# Altium PCB Mixed Signal Board Design Project.PcbDoc (part 2 of 2)
Units mm, origin at the board's own origin, x right, y up, seen from the top; angles counter-clockwise.
Board outline 70 x 70 mm, 4 copper layers (Top Layer, GND, VCC, Bottom Layer), stack 1.57 mm thick; 188 components, 142 nets, 738 pads, 121 vias.
Unrouted connection lines stored in the file: 495.
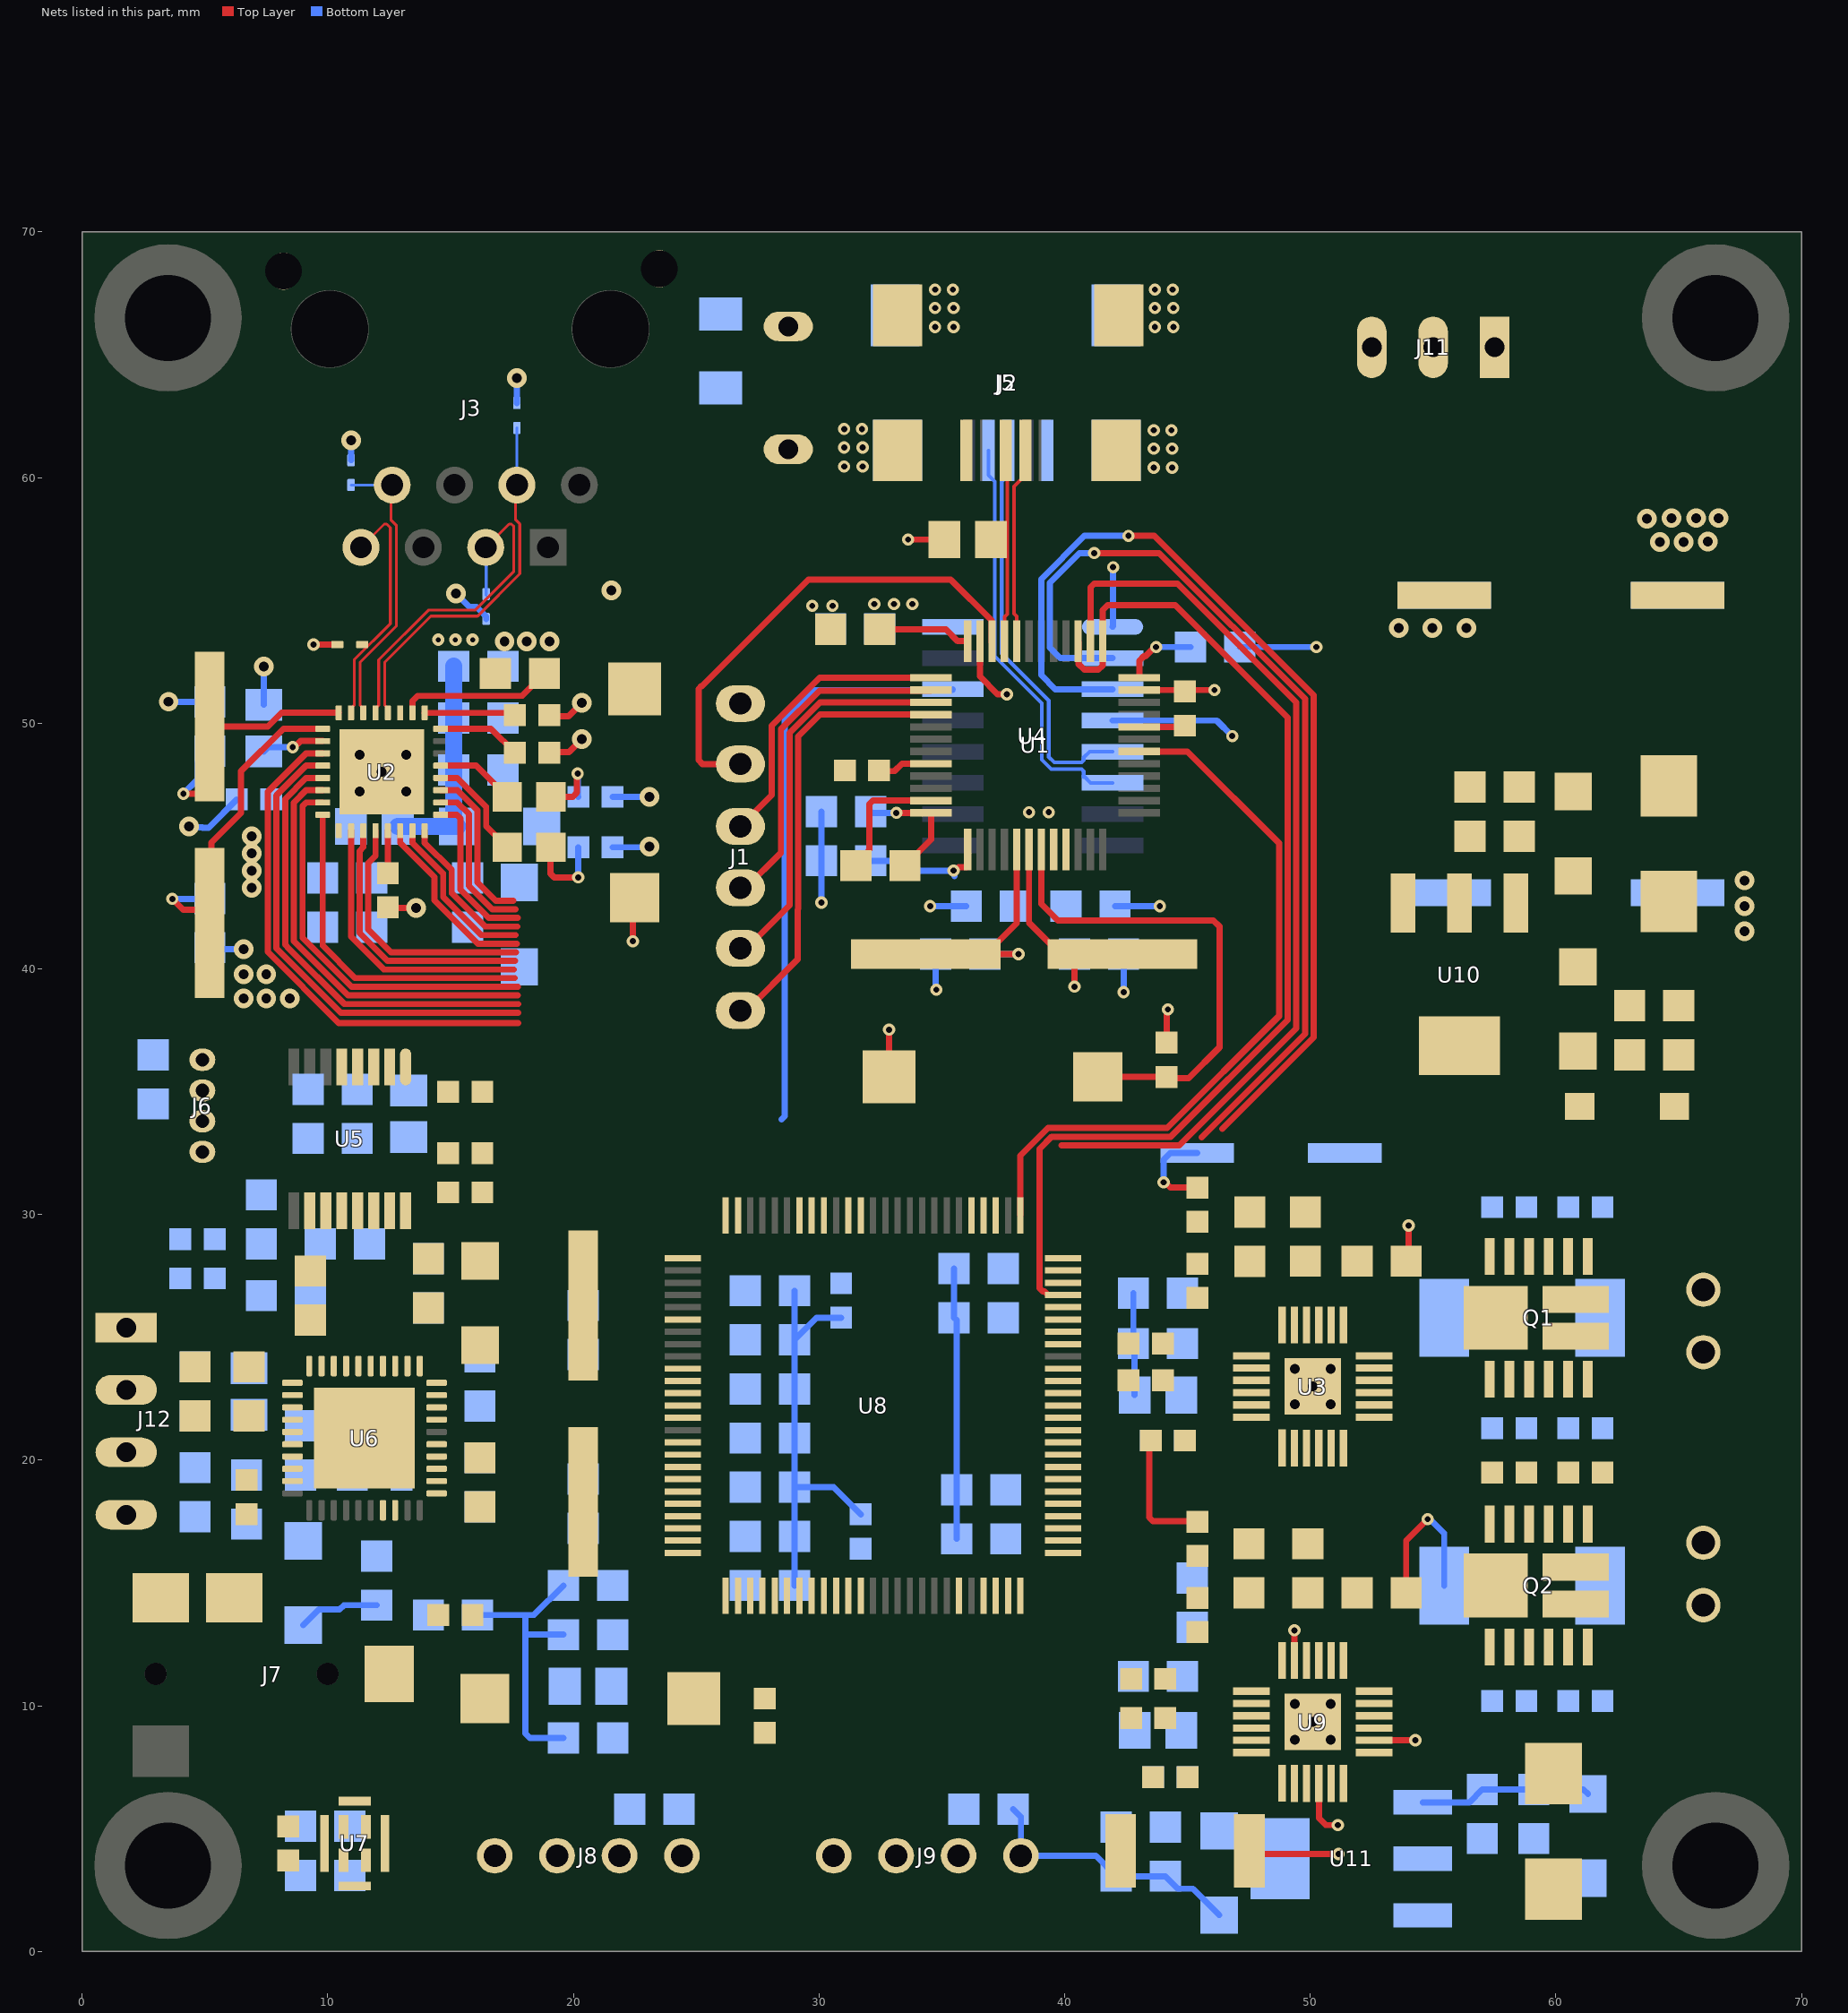
[diagram p4: the nets of this part, all layers, seen from the top]

## Part data (continued)
R2: library part RES_1.5K-0.125W-1%-0805, "1.5 kOhms ±1% 0.125W, 1/8W Chip Resistor 0805 (2012 Metric) Thick Film", Alternate Part Number-1=NA, Case/Package=0805, Manufacturer="TE Connectivity Passive Product", Manufacturer Part Number=CRG0805F1K5, Supplier Part Number-1=NA, Supplier-1=SIRICOM
R4 R8 R9 R10 R15 R16 R17 R18 R21 R22 R23 R24 R25 R26 R30 R33 R35 R39 R40 R41 R42 R45 R46 R47 R48: library part RES_10K-0.1W-1%-0603, "10 kOhms ±1% 0.1W, 1/10W Chip Resistor 0603 (1608 Metric) Automotive AEC-Q200 Thick Film", Alternate Part Number-1=0603WAJ0103T5E, Case/Package=0603, Manufacturer=Walsin, Manufacturer Part Number=WR06X1002FTL, Supplier Part Number-1=WR06X1002FTL, Supplier-1=SIRICOM
R5 R6 R7 R14 R38: library part RES_3.3K-0.1W-1%-0603, "3.3 kOhms ±1% 0.1W, 1/10W Chip Resistor 0603 (1608 Metric) Automotive AEC-Q200 Thick Film", Alternate Part Number-1=0603WAF3301T5E, Case/Package=0603, Manufacturer=Wilson, Manufacturer Part Number=WR06X3301FTL, Supplier Part Number-1=WR06X3301FTL, Supplier-1=SIRICOM
R11: library part RES_6.49K-0.125W-1%-0805, "6.49 kOhms ±1% 0.125W, 1/8W Chip Resistor 0805 (2012 Metric) Moisture Resistant Thick Film", Alternate Part Number-1=NA, Case/Package=0805, Manufacturer="Stackpole Electronics", Manufacturer Part Number=RC0805FR-076K49L, Supplier Part Number-1=WRO8X6491FTL, Supplier-1=SIRICOM
R12: library part RES_1M-0.25W-1%-1206, "1 MOhms ±1% 0.25W, 1/4W Chip Resistor 1206 (3216 Metric) Automotive AEC-Q200, High Voltage Thick Film", Alternate Part Number-1=NA, Case/Package=1206, Manufacturer=Walsin, Manufacturer Part Number=WR12X1004FTL, Supplier Part Number-1=WR12X1004FTL, Supplier-1=SIRICOM
R13 R37: library part RES_2K2-0.1W-5%-0603, "2.2 kOhms ±5% 0.1W, 1/10W Chip Resistor 0603 (1608 Metric) Automotive AEC-Q200 Thick Film", Alternate Part Number-1=WR06X2201FTL, Case/Package=0603, Manufacturer="Stackpole Electronics", Manufacturer Part Number=ERJ-3GEYJ222V, Supplier Part Number-1=WR06X2201FTL, Supplier-1=SIRICOM
R19 R43: library part RES_33K-0.125W-1%-0805, "Thick Film Resistors - SMD 33KOhms 1/8W 150V33 kOhms ±1% 0.125W, 1/8W Chip Resistor 0805 (2012 Metric) Thick Film", Alternate Part Number-1=NA, Case/Package=0805, Manufacturer="Vishay BCcomponents", Manufacturer Part Number=CRG0805F33K, Supplier Part Number-1=WR08X3302FTL, Supplier-1=SIRICOM
R20 R44: library part RES_50mOhm-2W-1%-2512, "50 mOhms ±1% 2W Chip Resistor 2512 (6432 Metric) Automotive AEC-Q200, Current Sense, Moisture Resistant Metal Element", Alternate Part Number-1=PMR100HZPFU5L00, Case/Package=2512, Manufacturer=Yageo, Manufacturer Part Number=PA2512FKF7W0R05E, Supplier Part Number-1=LR2512-22R060F1, Supplier-1=SIRICOM
R28 R29: library part RES_1K-0.1W-1%-0603, "1 kOhms ±1% 0.1W, 1/10W Chip Resistor 0603 (1608 Metric) Automotive AEC-Q200 Thick Film", Alternate Part Number-1=0603WAF1001T5E, Case/Package=0603, Manufacturer=Walsin, Manufacturer Part Number=WR06X1001FTL, Supplier Part Number-1=WR06X1001FTL, Supplier-1=SIRICOM
R31 R32: library part RES_51.1R-0.1W-1%-0603, "51.1 Ohms ±1% 0.1W, 1/10W Chip Resistor 0603 (1608 Metric) Thick Film", Alternate Part Number-1=NA, Case/Package=0603, Manufacturer="Vishay Dale", Manufacturer Part Number=CRCW060351R1FKEAC, Supplier Part Number-1="541-5468-1-ND - Cut Tape (CT)", Supplier-1=Digikey
SW1 SW2 SW3: library part SW1_RS-282G05A3-SMRT-SMD, "Tactile Switch SPST-NO Top Actuated Surface Mount", Alternate Part Number-1=NA, Case/Package=SMD, Manufacturer="ITT C&K", Manufacturer Part Number=RS-282G05A3-SMRT, Supplier Part Number-1=RS-282G05A3-SMRT, Supplier-1="SP ROAD"
U1: library part IC_STM32F103C8T6, "ARM® Cortex®-M3 STM32F1 Microcontroller IC 32-Bit 72MHz 64KB (64K x 8) FLASH 48-LQFP (7x7)", Alternate Part Number-1=NA, Case/Package=LQFP48, Manufacturer=STMicroelectronics, Manufacturer Part Number=STM32F103C8T6, Supplier Part Number-1=STM32F103C8T6, Supplier-1=LCSC
U2: library part IC_DP83826IRHBR, "Ethernet ICs Low latency 10/100-Mbps PHY, MII interface and enhanced mode with an industrial temperature range 32-VQFN -40 to 85", Alternate Part Number-1=NA, Case/Package=32-VQFN, Manufacturer="Texas Instruments", Supplier Part Number-1=595-DP83826IRHBR, Manufacturer Part Number=DP83826IRHBR, Supplier-1=Mouser
U3 U9: library part IC_DRV8701ERGET, "Motor Driver Power MOSFET Parallel 24-VQFN (4x4)", Alternate Part Number-1=NA, Case/Package=VFQFN24, Manufacturer="Texas Instruments", Manufacturer Part Number=DRV8701ERGET, Supplier Part Number-1=DRV8701ERGET, Supplier-1=ARROW
U4: library part IC_CH340C, "USB Bridge, USB to UART USB 2.0 UART Interface", Alternate Part Number-1=NA, Case/Package=SOIC16, Manufacturer=Olimex, Supplier Part Number-1=C84681, Manufacturer Part Number=CH340C, Supplier-1=LCSC
U5: library part IC_ADS122C04IPW, "24 Bit Analog to Digital Converter 4 Input 1 Sigma-Delta 16-TSSOP", Alternate Part Number-1=NA, Case/Package=TSSOP16, Manufacturer="Texas Instruments", Manufacturer Part Number=ADS122C04IPW, Supplier Part Number-1=ADS122C04IPW, Supplier-1=MOUSER
U6: library part IC_CS43L22, "Audio D/A Converter ICs Low Power Stereo DAC w/ClassD Spkr Driver", Alternate Part Number-1=NA, Case/Package=QFN-40, Manufacturer="Cirrus Logic", Supplier Part Number-1=777-CS43L22-CNZ, Manufacturer Part Number=CS43L22-CNZ, Supplier-1=Mouser
U7: library part IC_IMP34DT05TR, "MEMS Microphones AUTO & INDUSTRIAL SENSORS", Alternate Part Number-1=NA, Case/Package=HCLGA-4, Manufacturer=STMicroelectronics, Supplier Part Number-1=511-IMP34DT05TR, Manufacturer Part Number=IMP34DT05TR, Supplier-1=Mouser
U8: library part IC_STM32F407VGT6, "ARM® Cortex®-M4 STM32F4 Microcontroller IC 32-Bit 168MHz 1MB (1M x 8) FLASH 100-LQFP (14x14)", Alternate Part Number-1=STM32F407VET6, Case/Package=LQFP100, Manufacturer=STMicroelectronics, Manufacturer Part Number=STM32F407VGT6, Supplier Part Number-1=STM32F407VGT6, Supplier-1=ARROW
U10 U11: library part REG_15V-3.3V-0.9A-12W-SOT223, "Linear Voltage Regulator IC 1 Output 800mA SOT-223", Alternate Part Number-1=NA, Case/Package=SOT223, Manufacturer=STMicroelectronics, Manufacturer Part Number=LD1117S33CTR, Supplier Part Number-1=LD1117S33CTR, Supplier-1="SP ROAD"
X1 X2: library part XTAL_8MHZ-ECS-80-32-5PX-SMD, "8MHz ±30ppm Crystal 32pF 60 Ohms HC-49/US", Alternate Part Number-1=NA, Case/Package=SMD/SMT, Manufacturer="Fox Electronics", Manufacturer Part Number=ECS-80-32-5PX-TR, Supplier Part Number-1=ECS-80-32-5PX-TR, Supplier-1="SP ROAD"
Y1: library part XTAL_25Mhz-FOXSDLF/250F-20, "25MHz ±30ppm Crystal 20pF 30 Ohms HC-49/US", Alternate Part Number-1=NA, Case/Package=SMD, Manufacturer=Abracon, Manufacturer Part Number=FOXSDLF/250F-20, Supplier Part Number-1=FOXSDLF/250F-20, Supplier-1=MOUSER

## Via types
v1: diameter 0.5, hole 0.25, Top Layer to Bottom Layer, tented both sides, 64 vias
v2: diameter 0.8, hole 0.4, Top Layer to Bottom Layer, tented both sides, 52 vias
v3: diameter 0.5, hole 0.2, Top Layer to Bottom Layer, tented both sides, 2 vias
v4: diameter 0.5/0.5 (per signal layer), hole 0.25, Top Layer to Bottom Layer, tented both sides, 1 vias
v5: diameter 0.8, hole 0.4, Top Layer to Bottom Layer, 1 vias
v6: diameter 0.5/0.5 (per signal layer), hole 0.2, Top Layer to Bottom Layer, tented both sides, 1 vias

## Nets (pads, with @x,y where several pads share a name; then routed paths per layer and width w, separated by ;. In a path a pad name is that pad's centre, name@x,y a point inside that pad or via, vN(x,y) a via of type N, cw(c..) or ccw(c..) an arc to the next point about the centre after c; other vN are vias at no path point)
+1V8: C41.2 C42.2 C90.2 C91.2 C92.2 D8.K FB4.1 U6.34 U11.2 U11.4
+3V3: C1.2 C2.2 C3.2 C4.2 C7.2 C8.2 C9.2 C16.1 C17.1 C18.1 C19.1 C29.2 C31.2 C35.2 C45.2 C46.2 C47.1 C48.2 C53.2 C54.2 C55.2 C56.2 C59.2 C60.2 C61.2 C62.2 C63.2 C64.2 C74.2 C84.2 C85.2 C86.2 D6.K FB1.1 FB3.1 FB5.1 J6.3 J8.3 J9.3 R2.2 R4.2 R7.1 R8.2 R9.2 R10.2 R23.2 R25.2 R26.2 R27.1 R30.2 R33.2 R35.2 R47.2 U1.1 U1.9 U1.24 U1.36 U1.48 U2.17 U4.4 U4.16 U5.13 U6.5 U6.8 U6.33 U7.1 U8.6 U8.11 U8.19 U8.28 U8.50 U8.75 U8.100 U10.2 U10.4 | length 31.7
  Top Layer w0.254: R8.2@12.45,42.501 12.476,42.475 v2(13.6,42.475) ; R7.1@19.019,48.8 19.044,48.825 19.825,48.825 v2(20.35,49.35) ; R9.2@19.019,50.322 19.066,50.275 19.8,50.275 v2(20.35,50.825) ; C3.2@32.475,53.825 35.163,53.825 35.65,53.338 U1.36@36.05,53.338 ; v1(33.15,46.35) U1.48@34.562,46.35 34.562,45.262 C4.2@33.5,44.2 ; v1(33.625,57.475) R2.2@35.1,57.475 ; v1(35.475,44) 35.542,44 35.681,44.139 36.027,44.139 36.05,44.162 U1.1@36.05,44.862 ; U1.24@43.038,51.85 43.038,52.538 43.218,52.718 43.276,52.718 43.658,53.1 v4(43.725,53.1) ; R4.2@44.15,36.999 44.15,38.3 v1(44.2,38.35)
  Bottom Layer w0.254: v2(4.35,45.8) 4.397,45.753 4.895,45.753 4.897,45.75 5.151,45.75 R10.2@6.301,46.9 ; C1.2@32.1,44.4 33.275,44.4 33.675,44 v1(35.475,44) 35.522,43.953 v1@35.522,43.778 ; C2.2@32.1,46.4 32.15,46.35 v1(33.15,46.35) ; U4.4@41.95,50.11 46.19,50.11 v1(46.825,49.475) ; v4(43.725,53.1) C9.2@45.125,53.1
  other v1: 38.55,46.375 39.35,46.375 32.25,54.85 33.05,54.85 33.8,54.85
  other v2: 6.9,43.3 6.9,44 6.9,44.7 6.9,45.4
+12V: C24.1 C25.1 C26.2 C76.1 C78.2 C81.1 C82.1 C83.1 D5.A D7.A J11.1 Q1.2 Q1.11 Q1.15 Q2.2 Q2.11 Q2.15 U3.1 U9.1
  other v2: 67.675,41.525 67.675,42.55 67.675,43.6 64.225,57.375 65.2,57.375 66.175,57.4 63.7,58.325 64.7,58.35 65.7,58.35 66.625,58.35
AIN0: J6.1 R28.2
AIN1: J6.2 R29.2
CAN_RX: J8.1 U8.70
CAN_TX: J8.2 U8.71
CH340_RST: U4.14 U8.57 | length 23.7
  Bottom Layer w0.254: 28.475,33.875 28.6,34 28.6,50.2 29.75,51.35 35.42,51.35 U4.14@35.45,51.38
CH340_RX_PORT: U4.3 U8.78 | length 40.8
  Top Layer w0.254: v1(42.6,57.625) 43.651,57.625 50.141,51.135 50.141,37.215 46.413,33.487
  Bottom Layer w0.254: U4.3@41.95,51.38 39.62,51.38 39.046,51.954 39.046,55.868 40.803,57.625 v1(42.6,57.625)
CH340_TX_PORT: U4.2 U8.79 | length 38.3
  Top Layer w0.254: v1(41.2,56.925) 43.851,56.925 49.787,50.989 49.787,37.362 45.575,33.15
  Bottom Layer w0.254: v1(41.2,56.925) 40.604,56.925 39.4,55.721 39.4,53.075 39.825,52.65 U4.2@41.95,52.65
CH340USB_N: J5.2 U4.6 | length 16.9
  Bottom Layer w0.15: J5.2@36.9,61.1 36.9,60.1 37.162,59.838 37.162,52.722 39.075,50.808 39.075,48.51 39.459,48.126 40.687,48.126 40.775,48.038 40.775,47.813 40.817,47.813 41.059,47.57 U4.6@41.95,47.57
CH340USB_P: J5.3 U4.5 | length 16.3
  Bottom Layer w0.15: J5.3@37.7,61.1 37.7,60.1 37.439,59.838 37.439,52.837 39.352,50.923 39.352,48.625 39.574,48.403 40.687,48.403 40.775,48.491 40.775,48.598 41.018,48.84 U4.5@41.95,48.84
CLK_MIC: U7.3 U8.65
COL: DS1.A U2.28 U8.26 | length 4.3
  Top Layer w0.25: U2.28@14.6,47.772 15.278,47.772 16.45,46.6 16.45,45.811 DS1.A@17.311,44.95
CRS: DS2.A U2.29 U8.23 | length 3.2
  Top Layer w0.25: U2.29@14.6,48.272 16.039,48.272 DS2.A@17.311,47
DOUT_MIC: U7.4 U8.53
DRDY: U5.14 U8.56
DVDD: C28.2 C80.2 R21.2 R22.2 R45.2 R46.1 U3.8 U9.8
EN: R24.1 U3.14 U8.45
EN_2: R48.1 U8.66 U9.14
ERATH: C22.1 R12.1
EXT_UART_RX: J9.1 U8.69
EXT_UART_TX: J9.2 U8.68
GH1: Q1.1 R16.1 U3.17
GH1_2: Q2.1 R40.1 U9.17
GH2: Q1.12 R15.1 U3.24
GH2_2: Q2.12 R39.1 U9.24
GL1: Q1.4 R18.2 U3.19
GL1_2: Q2.4 R42.2 U9.19
GL2: Q1.9 R17.2 U3.22
GL2_2: Q2.9 R41.2 U9.22
GND: C1.1 C2.1 C3.1 C4.1 C5.1 C6.1 C7.1 C8.1 C9.1 C11.1 C12.1 C13.1 C14.1 C15.1 C16.2 C17.2 C18.2 C19.2 C20.1 C21.1 C25.2 C26.1 C27.1 C28.1 C29.1 C30.1 C31.1 C33.1 C34.1 C35.1 C36.2 C37.1 C38.1 C39.1 C40.2 C41.1 C42.1 C44.2 C45.1 C46.1 C47.2 C48.1 C49.2 C50.2 C51.2 C52.2 C53.1 C54.1 C55.1 C56.1 C59.1 C60.1 C61.1 C62.1 C63.1 C64.1 C65.1 C66.1 C67.1 C68.1 C69.1 C70.1 C71.1 C72.1 C73.1 C74.1 C78.1 C79.1 C80.1 C81.2 C82.2 C83.2 C84.1 C85.1 C86.1 C87.1 C88.1 C89.1 C90.1 C91.1 C92.1 C93.1 C94.1 C95.1 D1.A D2.A D3.A D4.A D6.A D8.A J1.6 J2.5 J2.6 J5.5 J5.6 J6.4 J7.1 J8.4 J9.4 J11.2 J11.3 R1.2 R3.1 R5.1 R6.1 R11.1 R14.1 R19.1 R20.1 R24.2 R34.1 R36.1 R38.1 R43.1 R44.1 R48.2 SW1.2 SW2.1 SW3.1 U1.8 U1.23 U1.35 U1.47 U2.33 U3.5 U3.16 U3.20 U3.25 U4.1 U5.1 U5.2 U5.4 U5.5 U6.3 U6.17 U6.31 U6.35 U6.41 U7.5 U8.10 U8.20 U8.27 U8.74 U8.99 U9.5 U9.16 U9.20 U9.25 U10.1 U11.1 | length 134.7
  Top Layer w0.25: v1(9.426,53.202) 9.428,53.2 D1.A@10.395,53.2 ; v1(22.425,41.125) 22.425,42.825 SW2.1@22.5,42.9 ; C4.1@31.5,44.2 32.01,44.71 32.01,44.817 32.05,44.857 32.05,46.704 32.196,46.85 U1.47@34.562,46.85 ; SW1.2@32.85,35.6 v1(32.85,37.525) ; U1.35@36.55,53.338 36.55,51.9 37.271,51.179 37.646,51.179 v1(37.65,51.175) ; U1.23@43.038,51.35 44.848,51.35 R3.1@44.9,51.298 44.952,51.35 v1(46.1,51.35) ; R24.2@43.503,20.8 43.45,20.747 43.45,17.671 43.596,17.525 45.373,17.525 R38.1@45.4,17.498 ; v1(44.027,31.312) 44.094,31.312 44.308,31.098 R14.1@45.4,31.098 ; D8.A@47.525,4.1 47.65,3.975 v1(51.15,3.975) ; U9.5@49.35,11.85 v1(49.35,13.075) ; U9.16@50.35,6.846 50.35,5.425 50.625,5.15 v1(51.125,5.15) ; U9.20@52.6,8.6 v1(54.275,8.6) ; C78.1@53.9,14.6 53.9,16.725 v1(54.775,17.6) ; C26.1@53.9,28.1 54,28.2 v1(54,29.55)
  Bottom Layer w0.25: v2(3.525,50.875) 3.534,50.866 C20.1@5.2,50.866 ; C21.1@5.2,40.867 5.267,40.8 v2@6.65,40.8 ; R11.1@7.4,50.75 v2(7.4,52.3) ; C52.2@9.005,13.285 9.642,13.922 10.477,13.922 10.655,14.1 C49.2@12,14.1 ; D2.A@10.95,60.705 v2(10.949,61.507) ; v2(15.225,55.275) 15.773,54.727 16.063,54.727 16.45,54.34 D3.A@16.45,54.245 ; C40.2@16.1,13.7 18.05,13.7 ; v2(17.7,64.05) 17.702,64.047 17.702,63.033 D4.A@17.705,63.03 ; C65.1@19.6,8.7 18.225,8.7 18.05,8.875 18.05,12.925 ; C67.1@19.6,12.9 18.075,12.9 18.05,12.925 ; C69.1@19.6,14.9 18.4,13.7 18.05,13.7 ; R5.1@21.6,44.95 23.075,44.95 v2(23.1,44.975) ; R6.1@21.6,47 23.098,47 v2(23.105,46.993) ; C68.1@29,14.9 C70.1@29,16.9 C62.1@29,18.9 ; C59.1@29,26.9 C74.1@29,24.9 ; v1(30.1,42.7) C1.1@30.1,44.4 C2.1@30.1,46.4 ; R36.1@30.9,25.802 29.901,25.802 C74.1@29,24.9 ; R34.1@31.7,17.798 30.598,18.9 C62.1@29,18.9 ; v1(34.525,42.55) C7.1@36,42.55 ; C5.1@34.75,40.6 34.75,39.175 v1(34.775,39.15) ; C60.1@35.5,27.8 C71.1@35.5,25.8 35.6,25.7 C61.1@35.6,18.8 C72.1@35.6,16.8 ; C55.1@37.9,5.8 38.22,5.48 J9.4@38.22,3.9 41.267,3.9 C92.1@42.1,3.067 C91.1@44.1,3.067 44.61,2.557 45.224,2.557 C90.1@46.295,1.486 ; U4.1@41.95,53.92 41.975,53.945 v1(41.975,56.35) ; C8.1@42.05,42.55 v1(43.875,42.55) ; v1(42.4,39.05) C6.1@42.4,40.6 ; C27.1@42.8,26.8 C28.1@42.8,24.75 42.85,24.7 R19.1@42.85,22.65 ; v1(44.027,31.312) 44.012,31.312 44.025,31.325 44.025,32.225 44.3,32.5 C25.2@45.4,32.5 ; C9.1@47.125,53.1 v1(50.25,53.1) ; U11.1@54.575,6.075 56.475,6.075 C95.1@57,6.6 C94.1@59.1,6.6 61.119,6.6 C93.1@61.305,6.414 ; v1(54.775,17.6) 54.875,17.6 55.45,17.025 R44.1@55.45,14.9 ; 18.05,12.925 18.05,13.7 ; C62.1@29,18.9 C63.1@29,20.9 C64.1@29,22.9 C74.1@29,24.9
  other v1: 29.725,54.775 30.55,54.775 43.625,60.4 44.375,60.4 31.025,60.45 31.775,60.45 43.625,61.175 44.375,61.175 31.025,61.225 31.775,61.225 43.625,61.925 44.35,61.925 31.025,61.975 31.75,61.975 34.725,66.125 35.475,66.125 43.675,66.125 44.425,66.125 34.725,66.9 35.475,66.9 43.675,66.9 44.425,66.9 34.725,67.65 35.45,67.65 43.675,67.65 44.4,67.65
  other v2: 49.375,8.625 50.825,8.625 50.1,9.35 49.375,10.075 50.825,10.075 49.375,22.275 50.825,22.275 50.1,23 49.375,23.725 50.825,23.725 6.575,38.8 7.5,38.8 8.45,38.8 6.575,39.775 7.5,39.775 6.575,40.8 11.3,47.222 13.2,47.222 12.2,48.022 11.3,48.722 13.2,48.722 17.2,53.325 18.1,53.325 19.025,53.325 53.6,53.875 54.975,53.875 56.35,53.875
  other v5: 21.55,55.4
INT: R8.1 U2.21 | length 1.7
  Top Layer w0.25: R8.1@12.45,43.898 U2.21@12.45,45.622
JTCK/SWCLK_F103: J1.4 U1.37 | length 11.9
  Top Layer w0.254: J1.4@26.8,45.8 28.075,47.075 28.075,49.9 30.025,51.85 U1.37@34.562,51.85
JTCLK_F407: U1.18 U8.76 | length 29.6
  Top Layer w0.254: U8.76@38.2,29.965 38.2,32.4 39.325,33.525 44.175,33.525 48.725,38.075 48.725,45.125 45,48.85 U1.18@43.038,48.85
JTDI_F103: J1.3 U1.38 | length 14
  Top Layer w0.254: J1.3@26.8,43.3 27.025,43.3 28.45,44.725 28.45,49.75 30.027,51.327 34.539,51.327 U1.38@34.562,51.35
JTDO_F103: J1.2 U1.39 | length 16
  Top Layer w0.254: J1.2@26.8,40.84 27.05,40.84 28.804,42.594 28.804,49.603 30.051,50.85 U1.39@34.562,50.85
JTMS/SWDIO_F103: J1.5 U1.34 | length 20.1
  Top Layer w0.254: J1.5@26.8,48.34 25.249,48.34 25.1,48.489 25.1,51.401 25.199,51.5 25.225,51.5 29.575,55.85 35.359,55.85 37.027,54.182 37.027,53.298 U1.34@37.05,53.275
JTMS_F407: U1.25 U1.27 U8.72 | length 45.2
  Top Layer w0.254: U8.72@39.938,26.727 39.327,26.727 39.181,26.873 39.106,26.873 38.973,27.006 38.973,32.673 39.472,33.171 44.322,33.171 49.079,37.928 49.079,50.221 44.5,54.8 41.75,54.8 41.55,54.6 U1.25@41.55,53.338 41.55,52.35 41.375,52.175 40.8,52.175 40.573,52.402 40.573,53.315 U1.27@40.55,53.338
LRCK: U6.40 U8.90
MCLK: U6.37 U8.29
MDC: U2.12 U8.16 | length 19.5
  Top Layer w0.254: U2.12@9.8,48.272 9.123,48.272 7.915,47.064 7.915,40.836 10.536,38.215 17.75,38.215
MDIO: R10.1 U2.11 U8.25 | length 20.8
  Top Layer w0.254: U2.11@9.8,48.772 9.122,48.772 7.561,47.211 7.561,40.689 10.45,37.8 17.75,37.8
NetC5_2: C5.2 U1.5 X1.2 | length 7.5
  Top Layer w0.254: U1.5@38.05,44.862 38.05,41.852 36.798,40.6 v1(38.125,40.6)
  Bottom Layer w0.254: C5.2@36.75,40.6 v1(38.125,40.6)
NetC6_2: C6.2 U1.6 X1.1 | length 8.1
  Top Layer w0.254: U1.6@38.55,44.862 38.55,41.875 39.864,40.561 40.475,40.561 40.4,40.487 v1(40.4,39.275)
  Bottom Layer w0.254: v1@40.4,39.275 C6.2@40.4,40.6
NetC11_2: C11.2 U2.2 | length 6.3
  Top Layer w0.25: U2.2@13.45,50.422 13.45,50.899 13.663,51.113 17.916,51.113 C11.2@18.825,52.022
NetC12_2: C12.2 C13.2 C14.2 C15.2 FB1.2 U2.3 | length 9
  Bottom Layer w0.7: FB1.2@12.85,45.795 C12.2@15.285,45.795 15.133,45.947 C13.2@15.133,48.1 C14.2@15.133,50.209 C15.2@15.133,52.317
  other v3: 15.2,53.4 15.9,53.4
  other v6: 14.5,53.4
NetC20_2: C20.2 U2.8 Y1.2 | length 11.2
  Top Layer w0.254: v1(4.125,47.125) 4.727,47.125 5.2,47.598 Y1.2@5.2,49.866 7.566,49.866 8.122,50.422 U2.8@10.45,50.422
  Bottom Layer w0.254: v1(4.125,47.125) 4.692,47.692 4.692,48.358 C20.2@5.2,48.866
NetC21_2: C21.2 U2.9 Y1.1 | length 14
  Top Layer w0.254: v1(3.675,42.85) 4.123,42.402 Y1.1@5.2,42.402 ; Y1.1@5.2,41.866 Y1.1@5.2,42.402 ; U2.9@9.8,49.772 8.197,49.772 6.475,48.05 6.475,46.35 5.272,45.147 5.272,42.474 Y1.1@5.2,42.402
  Bottom Layer w0.254: v1(3.675,42.85) 5.184,42.85 C21.2@5.2,42.867
NetC22_2: C22.2 J3.9 J3.10 R12.2
NetC23_1: C23.1 U3.3
NetC23_2: C23.2 U3.4
NetC24_2: C24.2 U3.2
NetC27_2: C27.2 R13.1 U3.7
NetC30_2: C30.2 FB3.2 U5.12
NetC32_1: C32.1 C33.2 R29.1 U5.10
NetC32_2: C32.2 C34.2 R28.1 U5.11
NetC36_1: C36.1 R31.2
NetC37_2: C37.2 C38.2 C39.2 FB4.2 U6.13 U6.16
NetC40_1: C40.1 R32.2
NetC43_1: C43.1 U6.12
NetC43_2: C43.2 U6.11
NetC44_1: C44.1 U6.10
NetC49_1: C49.1 U6.27
NetC50_1: C50.1 U6.28
NetC51_1: C51.1 U6.19
NetC52_1: C52.1 U6.18
NetC66_2: C66.2 U8.12 X2.2
NetC67_2: C67.2 C68.2 C69.2 C70.2 FB5.2 U8.21 U8.22
NetC71_2: C71.2 U8.73
NetC72_2: C72.2 U8.49
NetC73_2: C73.2 U8.13 X2.1
NetC75_1: C75.1 U9.3
NetC75_2: C75.2 U9.4
NetC76_2: C76.2 U9.2
NetC79_2: C79.2 R37.1 U9.7
NetC87_2: C87.2 C88.2 C89.2 D5.K U10.3
NetC93_2: C93.2 C94.2 C95.2 D7.K U11.3
NetDS1_K: DS1.K R5.2 | length 3.5
  Top Layer w0.254: DS1.K@19.089,44.95 19.075,44.936 19.075,43.874 19.224,43.725 v1(20.2,43.725)
  Bottom Layer w0.254: v1(20.2,43.725) 20.203,43.728 R5.2@20.203,44.95
NetDS2_K: DS2.K R6.2 | length 2.9
  Top Layer w0.254: DS2.K@19.089,47 19.975,47 20.15,47.175 20.15,47.925 v1(20.175,47.95)
  Bottom Layer w0.254: v1(20.175,47.95) 20.175,47.028 R6.2@20.203,47
NetJ7_2: J7.2 R31.1 U6.14
NetJ7_3: J7.3 R32.1 U6.15
NetR1_1: R1.1 U1.44 | length 2.2
  Top Layer w0.254: R1.1@32.448,48.075 32.473,48.05 33.075,48.05 33.375,48.35 U1.44@34.562,48.35
NetR3_2: R3.2 U1.20 | length 1.9
  Top Layer w0.254: U1.20@43.038,49.85 44.849,49.85 R3.2@44.9,49.901
NetR9_1: R9.1 U2.1 | length 3.7
  Top Layer w0.25: U2.1@13.95,50.422 17.522,50.422 R9.1@17.622,50.322
NetR11_2: R11.2 U2.10 | length 2.6
  Top Layer w0.254: v1(8.575,49.025) 8.642,49.025 8.888,49.272 U2.10@9.8,49.272
  Bottom Layer w0.254: R11.2@7.4,48.85 7.575,49.025 v1(8.575,49.025)
NetR13_2: R13.2 R14.2 U3.6
NetR19_2: R19.2 U3.12
NetR23_1: R23.1 U3.13
NetR33_1: R33.1 U7.2
NetR34_2: R34.2 U8.37
NetR36_2: R36.2 U8.94
NetR37_2: R37.2 R38.2 U9.6
NetR43_2: R43.2 U9.12
NetR47_1: R47.1 U9.13
nFAULT: R22.1 U3.9 U8.62
nFAULT_2: R46.2 U8.59 U9.9
NRST: R4.1 SW1.1 U1.7 | length 20.3
  Top Layer w0.254: U1.7@39.05,44.862 39.05,42.65 39.725,41.975 46.05,41.975 46.3,41.725 46.3,36.8 45.05,35.55 44.202,35.55 R4.1@44.15,35.602 SW1.1@41.35,35.6 SW1.1@41.35,35.6
NRST_F407: C65.2 R35.1 SW3.2 U1.26 U8.14 | length 37.4
  Top Layer w0.254: 39.875,32.817 44.668,32.817 49.433,37.582 49.433,50.842 44.6,55.675 41.199,55.675 41.05,55.526 U1.26@41.05,53.338
NTJRST_F103: J1.1 U1.40 | length 18.1
  Top Layer w0.254: J1.1@26.8,38.3 27.05,38.3 29.125,40.375 29.125,42.414 29.158,42.447 29.158,49.457 30.051,50.35 U1.40@34.562,50.35
OUTA+: J12.1 U6.4
OUTA-: J12.2 U6.6
OUTB+: J12.3 U6.7
OUTB-: J12.4 U6.9
PH: U3.15 U8.63
PH_2: U8.60 U9.15
PHY_RESET: R7.2 SW2.2 U2.32 U8.64 | length 3.4
  Top Layer w0.25: U2.32@14.6,49.772 16.65,49.772 R7.2@17.622,48.8
RD_N: D4.K J3.6 U2.4 | length 15.1
  Top Layer w0.115: U2.4@12.45,50.422 12.45,50.597 12.321,50.726 12.321,52.479 14.2,54.358 16.1,54.358 17.821,56.079 17.821,58.108 17.652,58.277 17.652,59.642 J3.6@17.705,59.695
  Bottom Layer w0.115: J3.6@17.705,59.695 D4.K@17.705,62.02
RD_P: D3.K J3.5 U2.5 | length 14.6
  Top Layer w0.115: U2.5@11.95,50.422 11.95,50.597 12.079,50.726 12.079,52.579 14.1,54.6 16,54.6 17.579,56.179 17.579,58.008 17.481,58.106 17.386,58.106 J3.5@16.435,57.155
  Bottom Layer w0.115: J3.5@16.435,57.155 16.45,57.14 D3.K@16.45,55.205
RESET: R27.2 U5.3 U8.55
RESET_DAC: R30.1 U6.32 U8.54
RX_CLK: U2.19 U8.24 | length 11
  Top Layer w0.25: U2.19@11.45,45.622 11.45,44.95 11.3,44.8 11.3,44.451 11.3,41.455 12.43,40.325 17.631,40.325
RX_D0: U2.16 U8.33 | length 13.7
  Top Layer w0.25: U2.16@9.8,46.272 9.8,40.945 11.12,39.625 17.604,39.625
RX_D1: U2.15 U8.34 | length 15.8
  Top Layer w0.25: U2.15@9.8,46.772 9.122,46.772 8.975,46.625 8.975,41.275 10.975,39.275 17.749,39.275
RX_D2: U2.14 U8.35 | length 17.1
  Top Layer w0.254: U2.14@9.8,47.272 9.798,47.27 9.122,47.27 8.623,46.771 8.623,41.129 8.775,40.977 10.829,38.923 17.733,38.923
RX_D3: U2.13 U8.36 | length 18.3
  Top Layer w0.254: U2.13@9.8,47.772 9.798,47.77 9.121,47.77 8.269,46.917 8.269,40.983 8.425,40.827 10.683,38.569 17.758,38.569
RX_DV: U2.18 U8.32 | length 11.5
  Top Layer w0.25: U2.18@10.95,45.622 10.95,41.31 12.285,39.975 17.582,39.975
RX_ER: U2.20 U8.47 | length 10.5
  Top Layer w0.25: U2.20@11.95,45.622 11.95,44.606 11.65,44.306 11.65,41.6 12.575,40.675 17.668,40.675
SCL: R25.1 U5.16 U6.2 U8.92
SCLK: U6.38 U8.89
SDA: R26.1 U5.15 U6.1 U8.93
SDIN: U6.39 U8.80
SH1: J4.1 Q1.3 Q1.13 R16.2 U3.18
SH1_2: J10.1 Q2.3 Q2.13 R40.2 U9.18
SH2: J4.2 Q1.10 Q1.14 R15.2 R17.1 U3.23
SH2_2: J10.2 Q2.10 Q2.14 R39.2 R41.1 U9.23
SNSOUT: R21.1 U3.10 U8.61
SNSOUT_2: R45.1 U8.58 U9.10
SO: U3.11 U8.30
SO_2: U8.31 U9.11
SP: Q1.5 Q1.6 Q1.7 Q1.8 R18.1 R20.2 U3.21
SP_2: Q2.5 Q2.6 Q2.7 Q2.8 R42.1 R44.2 U9.21
TD_N: D2.K J3.2 U2.6 | length 11.7
  Top Layer w0.115: U2.6@11.45,50.422 11.45,50.597 11.321,50.726 11.321,52.479 12.792,53.95 12.792,58.057 12.572,58.277 12.572,59.642 J3.2@12.625,59.695
  Bottom Layer w0.115: D2.K@10.95,59.695 J3.2@12.625,59.695
TD_P: D1.K J3.1 U2.7 | length 9.8
  Top Layer w0.115: U2.7@10.95,50.422 10.95,50.597 11.079,50.726 11.079,52.579 12.55,54.05 12.55,57.957 12.401,58.106 12.306,58.106 J3.1@11.355,57.155
TX_CLK: U2.22 U8.18 | length 7.5
  Top Layer w0.25: U2.22@12.95,45.622 12.95,45.135 14.35,43.735 14.35,42.79 16.115,41.025 17.703,41.025
TX_D0: U2.24 U8.51 | length 6.2
  Top Layer w0.25: U2.24@13.95,45.622 13.95,45.125 15.05,44.025 15.05,43.08 16.405,41.725 17.725,41.725
TX_D1: U2.25 U8.52 | length 6.6
  Top Layer w0.25: U2.25@14.6,46.272 15.254,46.272 15.4,46.125 15.4,43.225 16.55,42.075 17.735,42.075
TX_D2: U2.26 U8.17 | length 6.6
  Top Layer w0.25: U2.26@14.6,46.772 15.278,46.772 15.75,46.3 15.75,43.38 16.705,42.425 17.651,42.425
TX_D3: U2.27 U8.1 | length 6.5
  Top Layer w0.25: U2.27@14.6,47.272 15.283,47.272 16.1,46.455 16.1,43.525 16.85,42.775 17.552,42.775
TX_EN: U2.23 U8.48 | length 6.8
  Top Layer w0.25: U2.23@13.45,45.622 13.45,45.13 14.7,43.88 14.7,42.935 16.26,41.375 17.65,41.375
USB_N: J2.2 U1.32 | length 8
  Top Layer w0.15: U1.32@38.05,53.338 38.05,54.35 37.938,54.462 37.938,59.638 38.4,60.1 J2.2@38.4,61.1
USB_P: J2.3 R2.1 U1.33 | length 8.5
  Top Layer w0.15: R2.1@37,57.475 37.05,57.525 R2.1@37.65,57.525 ; U1.33@37.55,53.338 37.55,54.325 37.661,54.437 37.661,57.525 37.661,61.038 J2.3@37.6,61.1
pads on no net: J2.1 J2.4 J3. J3.3 J3.4 J3.7 J3.8 J5.1 J5.4 J7. J7.4 J12. MH1.1 MH2.1 MH3.1 MH4.1 U1.2 U1.3 U1.4 U1.10 U1.11 U1.12 U1.13 U1.14 U1.15 U1.16 U1.17 U1.19 U1.21 U1.22 U1.28 U1.29 U1.30 U1.31 U1.41 U1.42 U1.43 U1.45 U1.46 U2.30 U2.31 U4.7 U4.8 U4.9 U4.10 U4.11 U4.12 U4.13 U4.15 U5.6 U5.7 U5.8 U5.9 U6.20 U6.21 U6.22 U6.23 U6.24 U6.25 U6.26 U6.29 U6.30 U6.36 U8.2 U8.3 U8.4 U8.5 U8.7 U8.8 U8.9 U8.15 U8.38 U8.39 U8.40 U8.41 U8.42 U8.43 U8.44 U8.46 U8.67 U8.77 U8.81 U8.82 U8.83 U8.84 U8.85 U8.86 U8.87 U8.88 U8.91 U8.95 U8.96 U8.97 U8.98

## Polygon pours and split planes (outlines as drawn)
GND on Bottom Layer "NONET_L01_P-001" (solid, pour order 18): 53.5,56.175 52.9,55.575 52.9,52.825 53.275,52.45 57.475,52.45 57.75,52.725 57.75,55.775 57.35,56.175
+12V on Bottom Layer "NONET_L01_P-001" (solid, pour order 15): 63.025,54.35 62.6,54.775 62.6,58.625 63.125,59.15 66.825,59.15 67.45,58.525 67.45,54.95 66.85,54.35
+3V3 on Bottom Layer "NONET_L01_P-001" (solid, pour order 13): 31.7,52.95 31.7,54.875 31.975,55.15 35.275,55.15 36.209,54.216 36.209,52.498 36.198,52.498 36.175,52.475 35.825,52.475 35.4,52.9 31.75,52.9
GND on Bottom Layer "NONET_L01_P-001" (solid, pour order 10): 29.35,41.775 29.625,41.5 32.05,41.5 32.35,41.8 32.35,42.675 31.875,43.15 30.95,43.15 30.825,43.275 30.825,47.05 30.775,47.1 29.4,47.1 29.35,47.05
GND on Bottom Layer "NONET_L01_P-001" (solid, pour order 9): 31.1,53.1 31.2,53.2 31.2,54.775 30.925,55.05 29.575,55.05 29.3,54.775 29.3,53.275 29.475,53.1
+3V3 on Bottom Layer "NONET_L01_P-001" (solid, pour order 5): 37.3,41.825 37.25,41.875 37.25,43.4 38.15,44.3 38.15,46.575 38.3,46.725 39.75,46.725 39.95,46.525 39.95,44.3 40.8,43.45 40.8,41.875 40.75,41.825
GND on Bottom Layer "NONET_L01_P-001" (solid, pour order 4): 17.65,38.25 18.75,39.35 18.75,41 18.6,41.15 16.55,41.15 16.45,41.25 16.45,42.4 16.4,42.45 14.9,42.45 14.85,42.4 14.85,41 14.75,40.9 12.7,40.9 12.55,41.05 12.55,42.4 12.5,42.45 6.55,42.45 6,41.9 6,41 5.9,40.9 5.9,40.7 6,40.6 6,38.575 6.325,38.25
GND on Bottom Layer "NONET_L01_P-001" (solid, pour order 3): 16.75,53.75 16.45,53.45 16.45,45.25 16.725,44.975 19.45,44.975 19.581,45.106 19.581,53.469 19.3,53.75
+3V3 on Bottom Layer "NONET_L01_P-001" (solid, pour order 2): 12.975,42.975 13.225,42.725 13.225,42 13.35,41.875 13.75,41.875 13.875,42 13.875,42.7 14.15,42.975 16.625,42.975 16.95,42.65 18.475,42.65 18.65,42.825 18.65,44.4 18.575,44.475 11.975,44.475 11.75,44.7 11.75,46.525 11.675,46.6 7.525,46.6 6.45,45.525 6.45,43.15 6.625,42.975
NetC12_2 on Bottom Layer "NONET_L01_P-001" (solid, pour order 1): 16.25,53.749 16.199,53.8 14.4,53.8 14.225,53.625 14.225,51.625 14.475,51.375 14.7,51.375 14.875,51.2 15.4,51.2 15.575,51.375 15.675,51.375 15.825,51.525 15.825,52.75 16.25,53.175
+12V on Top Layer "NONET_L01_P-001" (solid, pour order 20): 63.2,44.4 62.875,44.075 62.875,41.25 63.3,40.825 68.15,40.825 68.525,41.2 68.525,43.975 68.1,44.4
NetC87_2 on Top Layer "NONET_L01_P-001" (solid, pour order 19): 65.925,46.15 65.9,46.175 59.95,46.175 59.5,46.625 55.2,46.625 54.425,45.85 54.425,41.4 54.2,41.175 53.25,41.175 53.05,41.375 53.05,47.2 54.75,48.9 65.8,48.9 66.25,48.45 66.25,46.4
GND on Top Layer "NONET_L01_P-001" (solid, pour order 17): 53.5,56.175 52.9,55.575 52.9,52.825 53.275,52.45 57.475,52.45 57.75,52.725 57.75,55.775 57.35,56.175
+12V on Top Layer "NONET_L01_P-001" (solid, pour order 16): 63.025,54.35 62.6,54.775 62.6,58.625 63.125,59.15 66.8,59.15 67.45,58.5 67.45,54.95 66.85,54.35
+3V3 on Top Layer "NONET_L01_P-001" (solid, pour order 12): 31.698,52.951 31.698,54.876 31.973,55.151 35.273,55.151 36.208,54.216 36.208,52.499 36.197,52.499 36.173,52.476 35.823,52.476 35.398,52.901 31.748,52.901
GND on Top Layer "NONET_L01_P-001" (solid, pour order 11): 30.625,48.625 29.725,47.725 29.725,42.375 30.6,41.5 32.05,41.5 32.35,41.8 32.35,44.8 31.875,45.275 31.5,45.65 31.5,48.575 31.45,48.625
GND on Top Layer "NONET_L01_P-001" (solid, pour order 8): 31.1,53.1 31.2,53.2 31.2,54.775 30.925,55.05 29.575,55.05 29.3,54.775 29.3,53.275 29.475,53.1
+3V3 on Top Layer "NONET_L01_P-001" (solid, pour order 6): 39.9,44 39.875,44.025 39.875,45.875 39.8,45.95 38.225,45.95 38.15,46.025 38.15,46.575 38.3,46.725 39.75,46.725 40.225,46.25 40.225,44.025 40.2,44
NetC12_2 on Top Layer "NONET_L01_P-001" (solid, pour order 0): 12.775,50.05 12.75,50.075 12.75,52.15 14.4,53.8 16.2,53.8 16.25,53.75 16.25,53.175 16.1,53.025 15.825,52.75 15.825,51.525 15.75,51.45 13.35,51.45 13.15,51.25 13.15,50.075 13.125,50.05
+12V on VCC (split plane): 48.474,58.25 48.478,58.23 48.489,58.214 48.889,57.814 48.905,57.803 48.925,57.799 56.679,57.799 58.58,55.898 58.58,48.144 58.584,48.124 58.595,48.108 61.924,44.779 61.924,42.025 61.928,42.005 61.939,41.989 63.689,40.239 63.699,40.232 63.705,40.228 63.725,40.224 65.579,40.224 66.174,39.629 66.174,34.446 65.004,33.276 49.3,33.276 49.28,33.272 49.274,33.268 49.264,33.261 48.614,32.611 48.603,32.595 48.599,32.575 48.599,0.51 0.51,0.51 0.51,69.49 48.474,69.49
+12V on VCC (split plane): 69.49,0.51 48.701,0.51 48.701,32.554 49.321,33.174 65.025,33.174 65.045,33.178 65.061,33.189 66.261,34.389 66.272,34.405 66.276,34.425 66.276,39.65 66.272,39.67 66.268,39.676 66.261,39.686 65.636,40.311 65.62,40.322 65.6,40.326 63.746,40.326 62.026,42.046 62.026,44.8 62.022,44.82 62.011,44.836 58.682,48.165 58.682,55.919 58.678,55.938 58.667,55.955 56.736,57.886 56.72,57.897 56.7,57.901 48.946,57.901 48.576,58.271 48.576,69.49 69.49,69.49
GND on GND (split plane): 69.49,0.51 0.51,0.51 0.51,69.49 69.49,69.49

## Keep-outs
Keep-Out Layer:
  the board outline again, w0.1

## Other copper
Top Layer:
  rectangle net GND: 40.75,59.6 44.85,62.55
  rectangle net GND: 40.85,65.1 44.95,68.05
  region net GND: 34.55,62.6 30.45,62.6 30.45,59.65 34.55,59.65
  rectangle net GND: 31.85,65.1 35.95,68.05
Bottom Layer:
  rectangle net GND: 40.75,59.6 44.85,62.55
  rectangle net GND: 40.85,65.1 44.95,68.05
  region net GND: 34.55,62.6 30.45,62.6 30.45,59.65 34.55,59.65
  rectangle net GND: 31.85,65.1 35.95,68.05
VCC (plane layer: these items are gaps in the copper):
  lines w0.1: 48.525,69.975 48.525,58.25 48.925,57.85 56.7,57.85 58.631,55.919 58.631,48.144 61.975,44.8 61.975,42.025 63.725,40.275 65.6,40.275 66.225,39.65 66.225,34.425 65.025,33.225 49.3,33.225 48.65,32.575 48.65,0.05

## Silkscreen, mask and mechanical layers (free items; w line width, h text height)
Top Overlay:
  lines w0.1: 0,38 17.2,38 17.2,12.4 13.9,12.4 13.9,3.8 13.9,0

## Text inside footprints (layer, text, board x,y; h text height)
D5: Top Overlay "K" at 64.2,49.3 h0.89; Top Overlay "A" at 64.2,40.1 h0.89
D6: Top Overlay "A" at 59.2,34 h0.89; Top Overlay "K" at 66,34 h0.89
D7: Top Overlay "K" at 61.9,1.525 h0.89 r270; Top Overlay "A" at 62.025,8.65 h0.89 r270
DS1: Top Overlay "K" at 20.925,45.2 h0.56 r180; Top Overlay "A" at 16.212,45.125 h0.51 r180
DS2: Top Overlay "K" at 20.925,47.25 h0.56 r180; Top Overlay "A" at 16.212,47.175 h0.51 r180
U4: Bottom Overlay "16" at 35.55,54.555 h0.89; Bottom Overlay "9" at 34.822,43.591 h0.89; Bottom Overlay "8" at 42.716,43.468 h0.89; Bottom Overlay "1" at 42.789,54.428 h0.89
U5: Top Overlay "8" at 8.335,37.469 h0.64 r270; Top Overlay "9" at 8.339,28.997 h0.64 r270; Top Overlay "16" at 12.932,29.163 h0.64 r270; Top Overlay "1" at 12.911,37.252 h0.64 r270